# Altium PCB WaferPCB.PcbDoc (part 2 of 2)
Units mm, origin at the board's own origin, x right, y up, seen from the top; angles counter-clockwise.
Board outline 440 x 440 mm, 2 copper layers (Top Layer, Bottom Layer); 4 components, 400 nets, 800 pads, 0 vias.
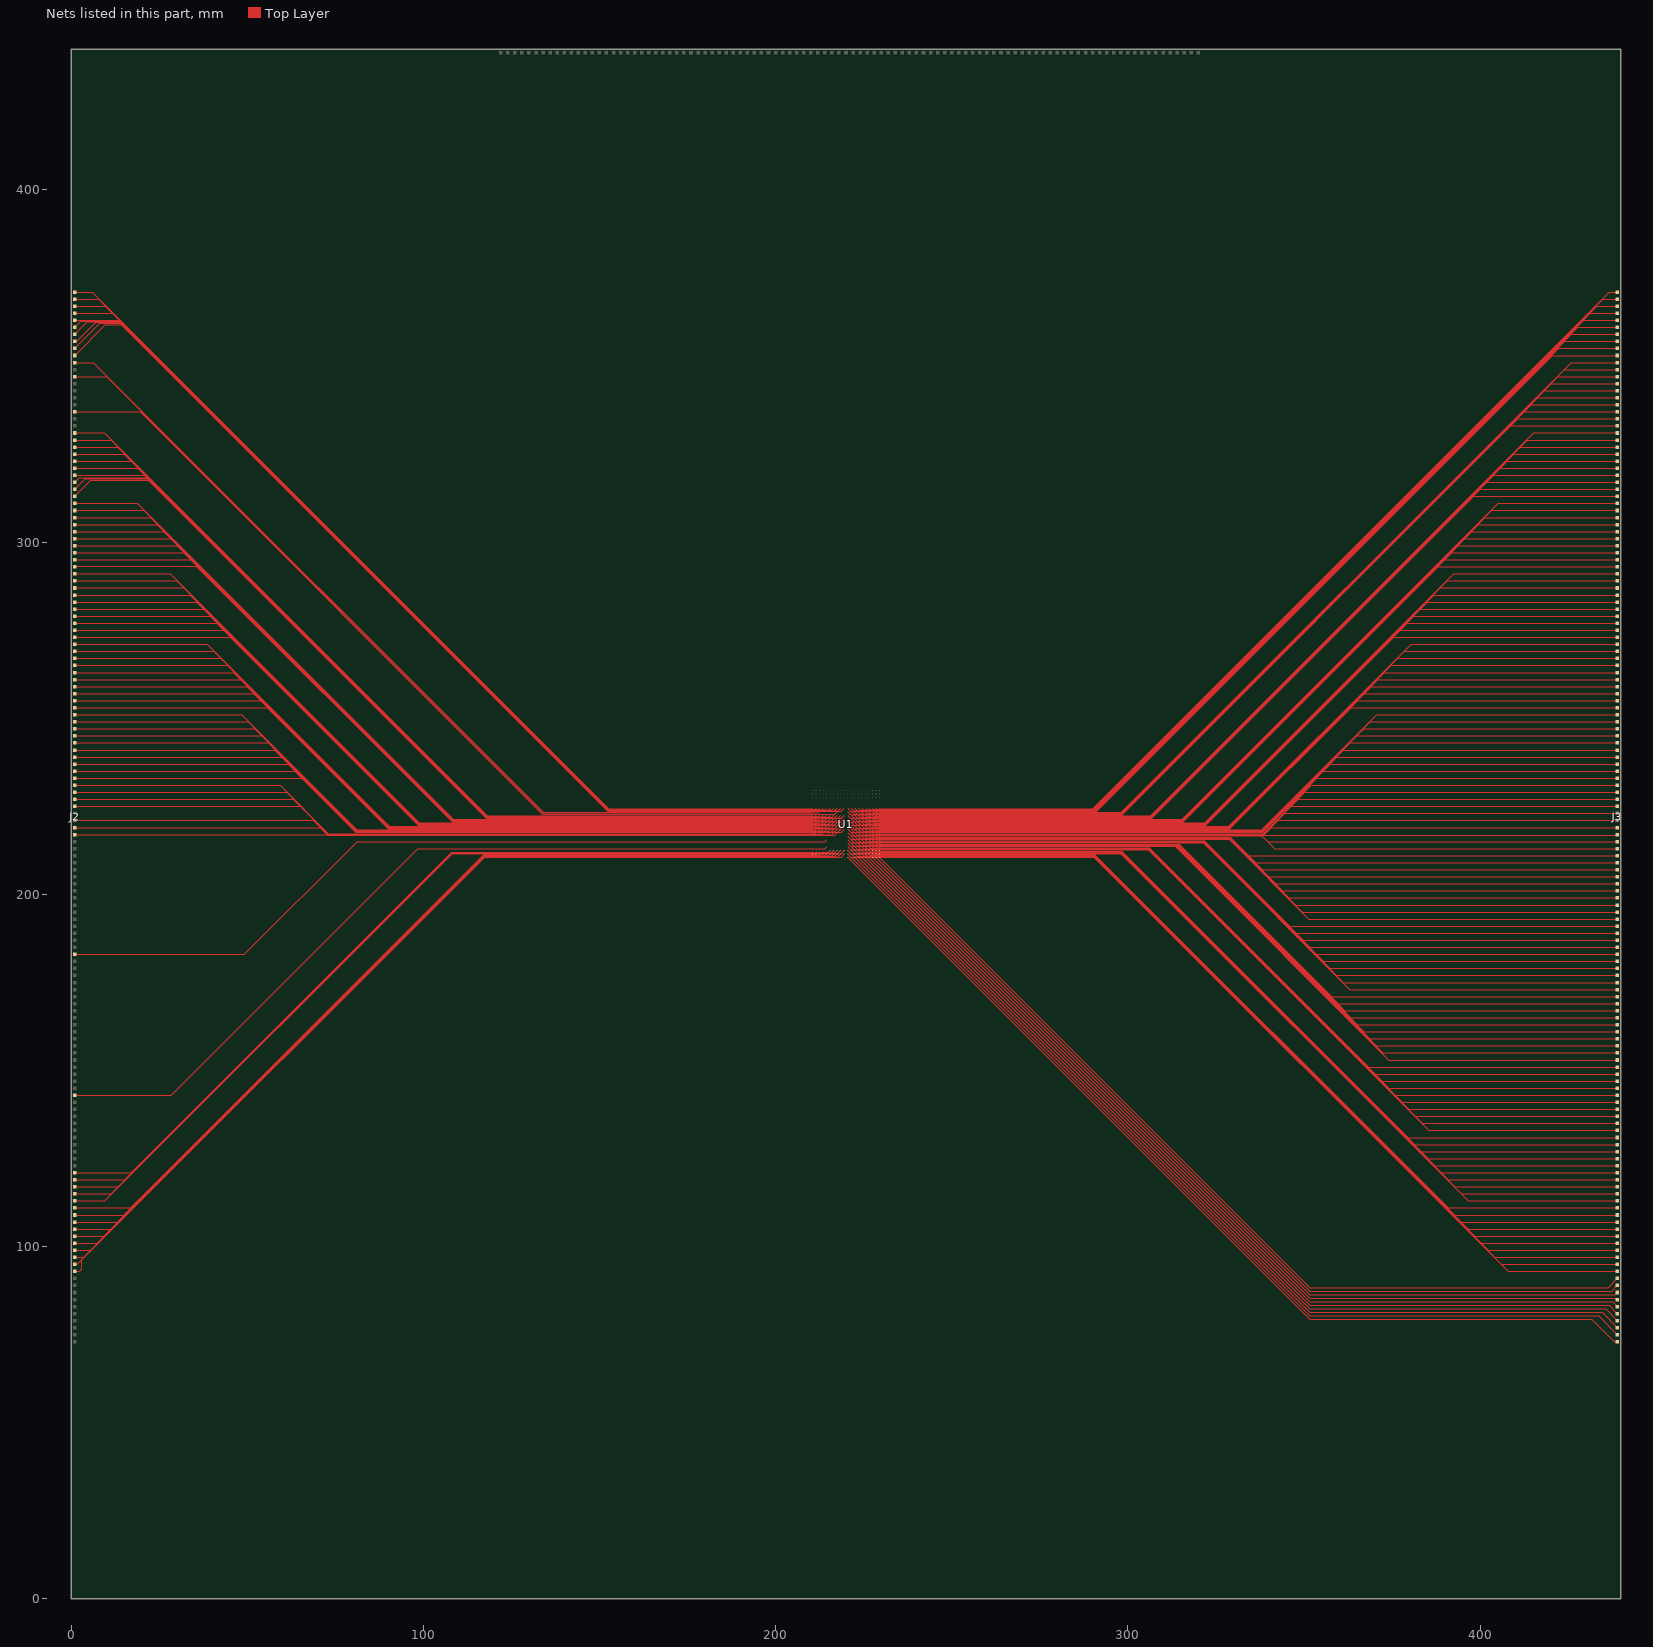
[diagram p2: the nets of this part, all layers, seen from the top]

## Nets (pads, with @x,y where several pads share a name; then routed paths per layer and width w, separated by ;. In a path a pad name is that pad's centre, name@x,y a point inside that pad or via, vN(x,y) a via of type N, cw(c..) or ccw(c..) an arc to the next point about the centre after c; other vN are vias at no path point) (continued)
NetJ2_64: J2.23 U1.348 | length 256.1
  Top Layer w0.03: J2.23@1,117 13.363,117 108.138,211.775 216.775,211.775 U1.348@217.5,212.5
NetJ2_65: J2.24 U1.347 | length 254.2
  Top Layer w0.03: J2.24@1,119 15.257,119 108.107,211.85 215.85,211.85 U1.347@216.5,212.5
NetJ2_66: J2.82 U1.229 | length 225
  Top Layer w0.03: J2.82@1,235 63.551,235 80.851,217.7 217.7,217.7 U1.229@218.5,218.5
NetJ2_67: J2.19 U1.362 | length 253
  Top Layer w0.03: J2.19@1,109 15.001,109 117.226,211.225 211.225,211.225 U1.362@211.5,211.5
NetJ2_68: J2.22 U1.349 | length 257.9
  Top Layer w0.03: J2.22@1,115 11.469,115 108.169,211.7 217.7,211.7 U1.349@218.5,212.5
NetJ2_69: J2.21 U1.350 | length 259.7
  Top Layer w0.03: J2.21@1,113 9.575,113 108.2,211.625 218.625,211.625 U1.350@219.5,212.5
NetJ2_70: J2.20 U1.361 | length 251.1
  Top Layer w0.03: J2.20@1,111 16.895,111 117.195,211.3 210.3,211.3 U1.361@210.5,211.5
NetJ2_71: J2.15 U1.366 | length 260.3
  Top Layer w0.03: J2.15@1,101 7.426,101 117.351,210.925 214.925,210.925 U1.366@215.5,211.5
NetJ2_72: J2.18 U1.363 | length 254.8
  Top Layer w0.03: J2.18@1,107 13.107,107 117.258,211.15 212.15,211.15 U1.363@212.5,211.5
NetJ2_73: J2.116 U1.165 | length 247.7
  Top Layer w0.03: J2.116@1,303 26.351,303 108.351,221 214,221 U1.165@214.5,221.5
NetJ2_74: J2.17 U1.364 | length 256.6
  Top Layer w0.03: J2.17@1,105 11.214,105 117.289,211.075 213.075,211.075 U1.364@213.5,211.5
NetJ2_75: J2.13 U1.368 | length 263.9
  Top Layer w0.03: J2.13@1,97 3.638,97 117.413,210.775 216.775,210.775 U1.368@217.5,211.5
NetJ2_76: J2.14 U1.367 | length 262.1
  Top Layer w0.03: J2.14@1,99 5.532,99 117.382,210.85 215.85,210.85 U1.367@216.5,211.5
NetJ2_77: J2.16 U1.365 | length 258.4
  Top Layer w0.03: J2.16@1,103 9.32,103 117.32,211 214,211 U1.365@214.5,211.5
NetJ2_78: J2.12 U1.369 | length 265.8
  Top Layer w0.03: J2.12@1,95 1.744,95 117.444,210.7 217.7,210.7 U1.369@218.5,211.5
NetJ2_79: J2.11 U1.370 | length 269.1
  Top Layer w0.03: J2.11@1,93 2.5,93 3.1,93.6 3.1,96.25 117.475,210.625 218.625,210.625 U1.370@219.5,211.5
NetJ2_80: J2.36 U1.325 | length 242.7
  Top Layer w0.03: J2.36@1,143 28.47,143 98.47,213 214,213 U1.325@214.5,213.5
NetJ2_81: J2.117 U1.164 | length 247.4
  Top Layer w0.03: J2.117@1,305 24.457,305 108.382,221.075 213.075,221.075 U1.164@213.5,221.5
NetJ2_82: J2.25 U1.346 | length 252.4
  Top Layer w0.03: J2.25@1,121 17.151,121 108.076,211.925 214.925,211.925 U1.346@215.5,212.5
NetJ2_83: J2.56 U1.285 | length 227
  Top Layer w0.03: J2.56@1,183 49.22,183 81.22,215 214,215 U1.285@214.5,215.5
NetJ2_84: J2.119 U1.162 | length 247
  Top Layer w0.03: J2.119@1,309 20.669,309 108.444,221.225 211.225,221.225 U1.162@211.5,221.5
NetJ2_85: J2.96 U1.205 | length 231.9
  Top Layer w0.03: J2.96@1,263 46.226,263 90.226,219 214,219 U1.205@214.5,219.5
NetJ2_86: J2.133 U1.128 | length 264.1
  Top Layer w0.03: J2.133@1,337 19.583,337 133.808,222.775 216.775,222.775 U1.128@217.5,223.5
NetJ2_87: J2.100 U1.201 | length 231
  Top Layer w0.03: J2.100@1,271 38.65,271 90.35,219.3 210.3,219.3 U1.201@210.5,219.5
NetJ2_88: J2.99 U1.202 | length 231.2
  Top Layer w0.03: J2.99@1,269 40.544,269 90.319,219.225 211.225,219.225 U1.202@211.5,219.5
NetJ2_89: J2.98 U1.203 | length 231.5
  Top Layer w0.03: J2.98@1,267 42.438,267 90.288,219.15 212.15,219.15 U1.203@212.5,219.5
NetJ2_90: J2.97 U1.204 | length 231.7
  Top Layer w0.03: J2.97@1,265 44.332,265 90.257,219.075 213.075,219.075 U1.204@213.5,219.5
NetJ2_91: J2.95 U1.206 | length 232.2
  Top Layer w0.03: J2.95@1,261 48.12,261 90.195,218.925 214.925,218.925 U1.206@215.5,219.5
NetJ2_92: J2.94 U1.207 | length 232.4
  Top Layer w0.03: J2.94@1,259 50.014,259 90.164,218.85 215.85,218.85 U1.207@216.5,219.5
NetJ2_93: J2.93 U1.208 | length 232.6
  Top Layer w0.03: J2.93@1,257 51.908,257 90.132,218.775 216.775,218.775 U1.208@217.5,219.5
NetJ2_94: J2.92 U1.209 | length 232.9
  Top Layer w0.03: J2.92@1,255 53.801,255 90.101,218.7 217.7,218.7 U1.209@218.5,219.5
NetJ2_95: J2.91 U1.210 | length 233.1
  Top Layer w0.03: J2.91@1,253 55.695,253 90.07,218.625 218.625,218.625 U1.210@219.5,219.5
NetJ2_96: J2.90 U1.221 | length 223.1
  Top Layer w0.03: J2.90@1,251 48.4,251 81.1,218.3 210.3,218.3 U1.221@210.5,218.5
NetJ2_97: J2.89 U1.222 | length 223.4
  Top Layer w0.03: J2.89@1,249 50.294,249 81.069,218.225 211.225,218.225 U1.222@211.5,218.5
NetJ2_98: J2.87 U1.224 | length 223.8
  Top Layer w0.03: J2.87@1,245 54.082,245 81.007,218.075 213.075,218.075 U1.224@213.5,218.5
NetJ2_99: J2.109 U1.182 | length 239.1
  Top Layer w0.03: J2.109@1,289 30.044,289 98.819,220.225 211.225,220.225 U1.182@211.5,220.5
NetJ2_100: J2.88 U1.223 | length 223.6
  Top Layer w0.03: J2.88@1,247 52.188,247 81.038,218.15 212.15,218.15 U1.223@212.5,218.5
NetJ2_101: J2.86 U1.225 | length 224.1
  Top Layer w0.03: J2.86@1,243 55.976,243 80.976,218 214,218 U1.225@214.5,218.5
NetJ2_102: J2.85 U1.226 | length 224.3
  Top Layer w0.03: J2.85@1,241 57.87,241 80.945,217.925 214.925,217.925 U1.226@215.5,218.5
NetJ2_103: J2.84 U1.227 | length 224.5
  Top Layer w0.03: J2.84@1,239 59.764,239 80.914,217.85 215.85,217.85 U1.227@216.5,218.5
NetJ2_104: J2.78 U1.243 | length 215.7
  Top Layer w0.03: J2.78@1,227 63.113,227 72.963,217.15 212.15,217.15 U1.243@212.5,217.5
NetJ2_105: J2.83 U1.228 | length 224.8
  Top Layer w0.03: J2.83@1,237 61.658,237 80.882,217.775 216.775,217.775 U1.228@217.5,218.5
NetJ2_106: J2.81 U1.230 | length 225.2
  Top Layer w0.03: J2.81@1,233 57.325,233 65.445,233 80.82,217.625 218.625,217.625 U1.230@219.5,218.5
NetJ2_107: J2.79 U1.242 | length 215.5
  Top Layer w0.03: J2.79@1,229 61.219,229 72.994,217.225 211.225,217.225 U1.242@211.5,217.5
NetJ2_108: J2.80 U1.241 | length 215.3
  Top Layer w0.03: J2.80@1,231 59.219,231 59.325,231 73.025,217.3 210.3,217.3 U1.241@210.5,217.5
NetJ2_109: J2.75 U1.246 | length 216.4
  Top Layer w0.03: J2.75@1,221 68.795,221 72.87,216.925 214.925,216.925 U1.246@215.5,217.5
NetJ2_110: J2.77 U1.244 | length 216
  Top Layer w0.03: J2.77@1,225 65.007,225 72.932,217.075 213.075,217.075 U1.244@213.5,217.5
NetJ2_111: J2.74 U1.247 | length 216.7
  Top Layer w0.03: J2.74@1,219 70.689,219 72.839,216.85 215.85,216.85 U1.247@216.5,217.5
NetJ2_112: J2.73 U1.248 | length 216.9
  Top Layer w0.03: J2.73@1,217 1.004,217.004 72.579,217.004 72.807,216.775 216.775,216.775 U1.248@217.5,217.5
NetJ2_113: J2.101 U1.190 | length 241
  Top Layer w0.03: J2.101@1,273 45.195,273 98.57,219.625 218.625,219.625 U1.190@219.5,220.5
NetJ2_114: J2.102 U1.189 | length 240.7
  Top Layer w0.03: J2.102@1,275 43.301,275 98.601,219.7 217.7,219.7 U1.189@218.5,220.5
NetJ2_115: J2.103 U1.188 | length 240.5
  Top Layer w0.03: J2.103@1,277 41.408,277 98.632,219.775 216.775,219.775 U1.188@217.5,220.5
NetJ2_116: J2.105 U1.186 | length 240
  Top Layer w0.03: J2.105@1,281 37.62,281 98.695,219.925 214.925,219.925 U1.186@215.5,220.5
NetJ2_117: J2.104 U1.187 | length 240.3
  Top Layer w0.03: J2.104@1,279 39.514,279 98.664,219.85 215.85,219.85 U1.187@216.5,220.5
NetJ2_118: J2.129 U1.142 | length 254.8
  Top Layer w0.03: J2.129@1,329 11.369,329 118.144,222.225 211.225,222.225 U1.142@211.5,222.5
NetJ2_119: J2.106 U1.185 | length 239.8
  Top Layer w0.03: J2.106@1,283 35.726,283 98.726,220 214,220 U1.185@214.5,220.5
NetJ2_120: J2.107 U1.184 | length 239.6
  Top Layer w0.03: J2.107@1,285 33.832,285 98.757,220.075 213.075,220.075 U1.184@213.5,220.5
NetJ2_121: J2.110 U1.181 | length 238.9
  Top Layer w0.03: J2.110@1,291 28.15,291 98.85,220.3 210.3,220.3 U1.181@210.5,220.5
NetJ2_122: J2.108 U1.183 | length 239.3
  Top Layer w0.03: J2.108@1,287 31.938,287 98.788,220.15 212.15,220.15 U1.183@212.5,220.5
NetJ2_123: J2.112 U1.169 | length 248.6
  Top Layer w0.03: J2.112@1,295 33.927,295 108.226,220.7 217.7,220.7 U1.169@218.5,221.5
NetJ2_124: J2.111 U1.170 | length 249
  Top Layer w0.03: J2.111@1,293 1.223,293.223 35.598,293.223 108.195,220.625 218.625,220.625 U1.170@219.5,221.5
NetJ2_125: J2.113 U1.168 | length 248.4
  Top Layer w0.03: J2.113@1,297 32.033,297 108.257,220.775 216.775,220.775 U1.168@217.5,221.5
NetJ2_126: J2.115 U1.166 | length 247.9
  Top Layer w0.03: J2.115@1,301 28.245,301 108.32,220.925 214.925,220.925 U1.166@215.5,221.5
NetJ2_127: J2.118 U1.163 | length 247.2
  Top Layer w0.03: J2.118@1,307 22.563,307 108.413,221.15 212.15,221.15 U1.163@212.5,221.5
NetJ2_128: J2.114 U1.167 | length 248.1
  Top Layer w0.03: J2.114@1,299 30.139,299 108.289,220.85 215.85,220.85 U1.167@216.5,221.5
NetJ2_129: J2.124 U1.147 | length 256
  Top Layer w0.03: J2.124@1,319 1.725,319 20.839,319 117.989,221.85 215.85,221.85 U1.147@216.5,222.5
NetJ2_130: J2.120 U1.161 | length 246.7
  Top Layer w0.03: J2.120@1,311 18.775,311 108.475,221.3 210.3,221.3 U1.161@210.5,221.5
NetJ2_131: J2.130 U1.141 | length 254.6
  Top Layer w0.03: J2.130@1,331 9.475,331 118.175,222.3 210.3,222.3 U1.141@210.5,222.5
NetJ2_132: J2.121 U1.150 | length 260.6
  Top Layer w0.03: J2.121@1,313 1.75,313.75 5.65,317.65 21.87,317.65 117.895,221.625 218.625,221.625 U1.150@219.5,222.5
NetJ2_133: J2.122 U1.149 | length 259
  Top Layer w0.03: J2.122@1,315 1.65,315.65 4,318 21.626,318 117.926,221.7 217.7,221.7 U1.149@218.5,222.5
NetJ2_134: J2.123 U1.148 | length 257.3
  Top Layer w0.03: J2.123@1,317 2.325,318.325 21.408,318.325 117.957,221.775 216.775,221.775 U1.148@217.5,222.5
NetJ2_135: J2.145 U1.106 | length 273
  Top Layer w0.03: J2.145@1,361 2.775,362.775 13.67,362.775 152.52,223.925 214.925,223.925 U1.106@215.5,224.5
NetJ2_136: J2.140 U1.121 | length 262.5
  Top Layer w0.03: J2.140@1,351 6.325,351 134.025,223.3 210.3,223.3 U1.121@210.5,223.5
NetJ2_137: J2.125 U1.146 | length 255.8
  Top Layer w0.03: J2.125@1,321 18.945,321 118.02,221.925 214.925,221.925 U1.146@215.5,222.5
NetJ2_138: J2.128 U1.143 | length 255.1
  Top Layer w0.03: J2.128@1,327 2.025,327 13.263,327 118.113,222.15 212.15,222.15 U1.143@212.5,222.5
NetJ2_139: J2.141 U1.110 | length 279.7
  Top Layer w0.03: J2.141@1,353 9.773,361.773 14.248,361.773 152.395,223.625 218.625,223.625 U1.110@219.5,224.5
NetJ2_140: J2.143 U1.108 | length 276.4
  Top Layer w0.03: J2.143@1,357 1.6,357 6.975,362.375 13.858,362.375 152.458,223.775 216.775,223.775 U1.108@217.5,224.5
NetJ2_141: J2.126 U1.145 | length 255.5
  Top Layer w0.03: J2.126@1,323 2.275,323 17.051,323 118.051,222 214,222 U1.145@214.5,222.5
NetJ2_142: J2.127 U1.144 | length 255.3
  Top Layer w0.03: J2.127@1,325 2.35,325 15.157,325 118.082,222.075 213.075,222.075 U1.144@213.5,222.5
NetJ2_143: J2.142 U1.109 | length 278.2
  Top Layer w0.03: J2.142@1,355 8.175,362.175 13.951,362.175 152.426,223.7 217.7,223.7 U1.109@218.5,224.5
NetJ2_144: J2.149 U1.102 | length 270.6
  Top Layer w0.03: J2.149@1,369 7.869,369 152.644,224.225 211.225,224.225 U1.102@211.5,224.5
NetJ2_145: J2.144 U1.107 | length 274.7
  Top Layer w0.03: J2.144@1,359 4.6,362.6 13.739,362.6 152.489,223.85 215.85,223.85 U1.107@216.5,224.5
NetJ2_146: J2.148 U1.103 | length 270.8
  Top Layer w0.03: J2.148@1,367 9.763,367 152.613,224.15 212.15,224.15 U1.103@212.5,224.5
NetJ2_147: J2.147 U1.104 | length 271
  Top Layer w0.03: J2.147@1,365 11.657,365 152.582,224.075 213.075,224.075 U1.104@213.5,224.5
NetJ2_148: J2.138 U1.123 | length 262.9
  Top Layer w0.03: J2.138@1,347 10.113,347 133.963,223.15 212.15,223.15 U1.123@212.5,223.5
NetJ2_149: J2.146 U1.105 | length 271.3
  Top Layer w0.03: J2.146@1,363 13.551,363 152.551,224 214,224 U1.105@214.5,224.5
NetJ2_150: J2.150 U1.101 | length 270.3
  Top Layer w0.03: J2.150@1,371 5.975,371 152.675,224.3 210.3,224.3 U1.101@210.5,224.5
NetJ3_1: J3.78 U1.258 | length 215.7
  Top Layer w0.03: U1.258@227.5,217.5 227.85,217.15 338.476,217.15 348.326,227 J3.78@439,227
NetJ3_2: J3.4 U1.394 | length 270
  Top Layer w0.03: U1.394@223.5,210.5 351.625,82.375 435.625,82.375 J3.4@439,79
NetJ3_3: J3.1 U1.391 | length 275.5
  Top Layer w0.03: U1.391@220.5,210.5 351.625,79.375 431.75,79.375 438.125,73 J3.1@439,73
NetJ3_4: J3.2 U1.392 | length 273.6
  Top Layer w0.03: U1.392@221.5,210.5 351.625,80.375 433.625,80.375 J3.2@439,75
NetJ3_5: J3.5 U1.395 | length 268.1
  Top Layer w0.03: U1.395@224.5,210.5 351.625,83.375 436.625,83.375 J3.5@439,81
NetJ3_6: J3.3 U1.393 | length 271.8
  Top Layer w0.03: U1.393@222.5,210.5 351.625,81.375 434.625,81.375 J3.3@439,77
NetJ3_7: J3.7 U1.397 | length 264.5
  Top Layer w0.03: U1.397@226.5,210.5 351.625,85.375 438.625,85.375 J3.7@439,85
NetJ3_8: J3.9 U1.399 | length 262.2
  Top Layer w0.03: U1.399@228.5,210.5 351.625,87.375 437.375,87.375 J3.9@439,89
NetJ3_9: J3.10 U1.400 | length 261.2
  Top Layer w0.03: U1.400@229.5,210.5 351.625,88.375 436.375,88.375 J3.10@439,91
NetJ3_10: J3.8 U1.398 | length 263.2
  Top Layer w0.03: U1.398@227.5,210.5 351.625,86.375 438.375,86.375 J3.8@439,87
NetJ3_11: J3.6 U1.396 | length 266.3
  Top Layer w0.03: U1.396@225.5,210.5 351.625,84.375 437.625,84.375 J3.6@439,83
NetJ3_12: J3.71 U1.251 | length 220.4
  Top Layer w0.03: U1.251@220.5,217.5 221.375,216.625 338.05,216.625 341.675,213 J3.71@439,213
NetJ3_13: J3.70 U1.280 | length 211.8
  Top Layer w0.03: U1.280@229.5,216.5 229.7,216.3 329.08,216.3 334.38,211 J3.70@439,211
NetJ3_14: J3.68 U1.278 | length 215.4
  Top Layer w0.03: U1.278@227.5,216.5 227.85,216.15 329.017,216.15 338.167,207 J3.68@439,207
NetJ3_15: J3.67 U1.277 | length 217.3
  Top Layer w0.03: U1.277@226.5,216.5 226.925,216.075 328.986,216.075 340.061,205 J3.67@439,205
NetJ3_16: J3.26 U1.356 | length 250.6
  Top Layer w0.03: U1.356@225.5,212.5 226,212 298.155,212 387.155,123 J3.26@439,123
NetJ3_17: J3.61 U1.271 | length 228.2
  Top Layer w0.03: U1.271@220.5,216.5 221.375,215.625 328.8,215.625 351.425,193 J3.61@439,193
NetJ3_18: J3.69 U1.279 | length 213.6
  Top Layer w0.03: U1.279@228.5,216.5 228.775,216.225 329.049,216.225 336.273,209 J3.69@439,209
NetJ3_19: J3.66 U1.276 | length 219.1
  Top Layer w0.03: U1.276@225.5,216.5 226,216 328.955,216 341.955,203 J3.66@439,203
NetJ3_20: J3.63 U1.273 | length 224.6
  Top Layer w0.03: U1.273@222.5,216.5 223.225,215.775 328.862,215.775 347.637,197 J3.63@439,197
NetJ3_21: J3.64 U1.274 | length 222.7
  Top Layer w0.03: U1.274@223.5,216.5 224.15,215.85 328.893,215.85 345.743,199 J3.64@439,199
NetJ3_22: J3.65 U1.275 | length 220.9
  Top Layer w0.03: U1.275@224.5,216.5 225.075,215.925 328.924,215.925 343.849,201 J3.65@439,201
NetJ3_23: J3.59 U1.299 | length 221.5
  Top Layer w0.03: U1.299@228.5,215.5 228.775,215.225 321.624,215.225 347.849,189 J3.59@439,189
NetJ3_24: J3.60 U1.300 | length 219.6
  Top Layer w0.03: U1.300@229.5,215.5 229.7,215.3 321.655,215.3 345.955,191 J3.60@439,191
NetJ3_25: J3.57 U1.297 | length 225.1
  Top Layer w0.03: U1.297@226.5,215.5 226.925,215.075 321.561,215.075 351.636,185 J3.57@439,185
NetJ3_26: J3.55 U1.295 | length 228.8
  Top Layer w0.03: U1.295@224.5,215.5 225.075,214.925 321.499,214.925 355.424,181 J3.55@439,181
NetJ3_27: J3.58 U1.298 | length 223.3
  Top Layer w0.03: U1.298@227.5,215.5 227.85,215.15 321.592,215.15 349.742,187 J3.58@439,187
NetJ3_28: J3.53 U1.293 | length 232.4
  Top Layer w0.03: U1.293@222.5,215.5 223.225,214.775 321.437,214.775 359.212,177 J3.53@439,177
NetJ3_29: J3.50 U1.320 | length 227.5
  Top Layer w0.03: U1.320@229.5,214.5 229.7,214.3 314.625,214.3 357.925,171 J3.50@439,171
NetJ3_30: J3.51 U1.291 | length 236.1
  Top Layer w0.03: U1.291@220.5,215.5 221.375,214.625 321.375,214.625 363,173 J3.51@439,173
NetJ3_31: J3.52 U1.292 | length 234.3
  Top Layer w0.03: U1.292@221.5,215.5 222.3,214.7 321.406,214.7 361.106,175 J3.52@439,175
NetJ3_32: J3.54 U1.294 | length 230.6
  Top Layer w0.03: U1.294@223.5,215.5 224.15,214.85 321.468,214.85 357.318,179 J3.54@439,179
NetJ3_33: J3.49 U1.319 | length 229.3
  Top Layer w0.03: U1.319@228.5,214.5 228.775,214.225 314.5,214.225 359.725,169 J3.49@439,169
NetJ3_34: J3.47 U1.317 | length 233
  Top Layer w0.03: U1.317@226.5,214.5 226.925,214.075 314.25,214.075 363.325,165 J3.47@439,165
NetJ3_35: J3.43 U1.313 | length 240.3
  Top Layer w0.03: U1.313@222.5,214.5 223.225,213.775 313.75,213.775 370.525,157 J3.43@439,157
NetJ3_36: J3.72 U1.252 | length 218.5
  Top Layer w0.03: U1.252@221.5,217.5 222.3,216.7 338.081,216.7 339.781,215 J3.72@439,215
NetJ3_37: J3.48 U1.318 | length 231.2
  Top Layer w0.03: U1.318@227.5,214.5 227.85,214.15 314.375,214.15 361.525,167 J3.48@439,167
NetJ3_38: J3.42 U1.312 | length 242.1
  Top Layer w0.03: U1.312@221.5,214.5 222.3,213.7 313.625,213.7 372.325,155 J3.42@439,155
NetJ3_39: J3.39 U1.339 | length 237.2
  Top Layer w0.03: U1.339@228.5,213.5 228.775,213.225 306.074,213.225 370.298,149 J3.39@439,149
NetJ3_40: J3.46 U1.316 | length 234.8
  Top Layer w0.03: U1.316@225.5,214.5 226,214 314.125,214 365.125,163 J3.46@439,163
NetJ3_41: J3.37 U1.337 | length 240.9
  Top Layer w0.03: U1.337@226.5,213.5 226.925,213.075 306.011,213.075 374.086,145 J3.37@439,145
NetJ3_42: J3.44 U1.314 | length 238.5
  Top Layer w0.03: U1.314@223.5,214.5 224.15,213.85 313.875,213.85 368.725,159 J3.44@439,159
NetJ3_43: J3.41 U1.311 | length 244
  Top Layer w0.03: U1.311@220.5,214.5 221.375,213.625 313.5,213.625 374.125,153 J3.41@439,153
NetJ3_44: J3.35 U1.335 | length 244.5
  Top Layer w0.03: U1.335@224.5,213.5 225.075,212.925 305.949,212.925 377.874,141 J3.35@439,141
NetJ3_45: J3.40 U1.340 | length 235.4
  Top Layer w0.03: U1.340@229.5,213.5 229.7,213.3 306.105,213.3 368.405,151 J3.40@439,151
NetJ3_46: J3.33 U1.333 | length 248.2
  Top Layer w0.03: U1.333@222.5,213.5 223.225,212.775 305.887,212.775 381.662,137 J3.33@439,137
NetJ3_47: J3.32 U1.332 | length 250
  Top Layer w0.03: U1.332@221.5,213.5 222.3,212.7 305.856,212.7 383.556,135 J3.32@439,135
NetJ3_48: J3.38 U1.338 | length 239
  Top Layer w0.03: U1.338@227.5,213.5 227.85,213.15 306.043,213.15 372.192,147 J3.38@439,147
NetJ3_49: J3.31 U1.331 | length 251.8
  Top Layer w0.03: U1.331@220.5,213.5 221.375,212.625 305.825,212.625 385.45,133 J3.31@439,133
NetJ3_50: J3.34 U1.334 | length 246.4
  Top Layer w0.03: U1.334@223.5,213.5 224.15,212.85 305.918,212.85 379.768,139 J3.34@439,139
NetJ3_51: J3.62 U1.272 | length 226.4
  Top Layer w0.03: U1.272@221.5,216.5 222.3,215.7 328.831,215.7 349.531,195 J3.62@439,195
NetJ3_52: J3.29 U1.359 | length 245.1
  Top Layer w0.03: U1.359@228.5,212.5 228.775,212.225 298.249,212.225 381.473,129 J3.29@439,129
NetJ3_53: J3.30 U1.360 | length 243.3
  Top Layer w0.03: U1.360@229.5,212.5 229.7,212.3 298.28,212.3 379.58,131 J3.30@439,131
NetJ3_54: J3.27 U1.357 | length 248.7
  Top Layer w0.03: U1.357@226.5,212.5 226.925,212.075 298.186,212.075 385.261,125 J3.27@439,125
NetJ3_55: J3.28 U1.358 | length 246.9
  Top Layer w0.03: U1.358@227.5,212.5 227.85,212.15 298.217,212.15 383.367,127 J3.28@439,127
NetJ3_56: J3.24 U1.354 | length 254.2
  Top Layer w0.03: U1.354@223.5,212.5 224.15,211.85 298.093,211.85 390.943,119 J3.24@439,119
NetJ3_57: J3.25 U1.355 | length 252.4
  Top Layer w0.03: U1.355@224.5,212.5 225.075,211.925 298.124,211.925 389.049,121 J3.25@439,121
NetJ3_58: J3.22 U1.352 | length 257.9
  Top Layer w0.03: U1.352@221.5,212.5 222.3,211.7 298.031,211.7 394.731,115 J3.22@439,115
NetJ3_59: J3.23 U1.353 | length 256.1
  Top Layer w0.03: U1.353@222.5,212.5 223.225,211.775 298.062,211.775 392.837,117 J3.23@439,117
NetJ3_60: J3.20 U1.380 | length 251.1
  Top Layer w0.03: U1.380@229.5,211.5 229.7,211.3 290.63,211.3 390.93,111 J3.20@439,111
NetJ3_61: J3.21 U1.351 | length 259.7
  Top Layer w0.03: U1.351@220.5,212.5 221.375,211.625 298,211.625 396.625,113 J3.21@439,113
NetJ3_62: J3.18 U1.378 | length 254.8
  Top Layer w0.03: U1.378@227.5,211.5 227.85,211.15 290.567,211.15 394.717,107 J3.18@439,107
NetJ3_63: J3.19 U1.379 | length 253
  Top Layer w0.03: U1.379@228.5,211.5 228.775,211.225 290.599,211.225 392.823,109 J3.19@439,109
NetJ3_64: J3.17 U1.377 | length 256.6
  Top Layer w0.03: U1.377@226.5,211.5 226.925,211.075 290.536,211.075 396.611,105 J3.17@439,105
NetJ3_65: J3.13 U1.373 | length 263.9
  Top Layer w0.03: U1.373@222.5,211.5 223.225,210.775 290.412,210.775 404.187,97 J3.13@439,97
NetJ3_66: J3.15 U1.375 | length 260.3
  Top Layer w0.03: U1.375@224.5,211.5 225.075,210.925 290.474,210.925 400.399,101 J3.15@439,101
NetJ3_67: J3.11 U1.371 | length 267.6
  Top Layer w0.03: U1.371@220.5,211.5 221.375,210.625 290.35,210.625 407.975,93 J3.11@439,93
NetJ3_68: J3.45 U1.315 | length 236.7
  Top Layer w0.03: U1.315@224.5,214.5 225.075,213.925 314,213.925 366.925,161 J3.45@439,161
NetJ3_69: J3.16 U1.376 | length 258.4
  Top Layer w0.03: U1.376@225.5,211.5 226,211 290.505,211 398.505,103 J3.16@439,103
NetJ3_70: J3.14 U1.374 | length 262.1
  Top Layer w0.03: U1.374@223.5,211.5 224.15,210.85 290.443,210.85 402.293,99 J3.14@439,99
NetJ3_71: J3.56 U1.296 | length 227
  Top Layer w0.03: U1.296@225.5,215.5 226,215 321.53,215 353.53,183 J3.56@439,183
NetJ3_72: J3.12 U1.372 | length 265.8
  Top Layer w0.03: U1.372@221.5,211.5 222.3,210.7 290.381,210.7 406.081,95 J3.12@439,95
NetJ3_73: J3.132 U1.132 | length 264.3
  Top Layer w0.03: U1.132@221.5,223.5 222.3,222.7 298.374,222.7 410.674,335 J3.132@439,335
NetJ3_74: J3.36 U1.336 | length 242.7
  Top Layer w0.03: U1.336@225.5,213.5 226,213 305.98,213 375.98,143 J3.36@439,143
NetJ3_75: J3.111 U1.171 | length 248.8
  Top Layer w0.03: U1.171@220.5,221.5 221.375,220.625 315.755,220.625 388.13,293 J3.111@439,293
NetJ3_76: J3.133 U1.133 | length 264.1
  Top Layer w0.03: U1.133@222.5,223.5 223.225,222.775 298.343,222.775 412.568,337 J3.133@439,337
NetJ3_77: J3.143 U1.113 | length 272
  Top Layer w0.03: U1.113@222.5,224.5 223.225,223.775 290.875,223.775 424.1,357 J3.143@439,357
NetJ3_78: J3.131 U1.131 | length 264.6
  Top Layer w0.03: U1.131@220.5,223.5 221.375,222.625 298.405,222.625 408.78,333 J3.131@439,333
NetJ3_79: J3.134 U1.134 | length 263.9
  Top Layer w0.03: U1.134@223.5,223.5 224.15,222.85 298.311,222.85 414.461,339 J3.134@439,339
NetJ3_80: J3.125 U1.155 | length 255.8
  Top Layer w0.03: U1.155@224.5,222.5 225.075,221.925 306.68,221.925 405.755,321 J3.125@439,321
NetJ3_81: J3.129 U1.159 | length 254.8
  Top Layer w0.03: U1.159@228.5,222.5 228.775,222.225 306.556,222.225 413.331,329 J3.129@439,329
NetJ3_82: J3.121 U1.151 | length 256.7
  Top Layer w0.03: U1.151@220.5,222.5 221.375,221.625 306.805,221.625 398.18,313 J3.121@439,313
NetJ3_83: J3.130 U1.160 | length 254.6
  Top Layer w0.03: U1.160@229.5,222.5 229.7,222.3 306.525,222.3 415.225,331 J3.130@439,331
NetJ3_84: J3.120 U1.180 | length 246.7
  Top Layer w0.03: U1.180@229.5,221.5 229.7,221.3 315.475,221.3 405.175,311 J3.120@439,311
NetJ3_85: J3.118 U1.178 | length 247.2
  Top Layer w0.03: U1.178@227.5,221.5 227.85,221.15 315.537,221.15 401.387,307 J3.118@439,307
NetJ3_86: J3.119 U1.179 | length 247
  Top Layer w0.03: U1.179@228.5,221.5 228.775,221.225 315.506,221.225 403.281,309 J3.119@439,309
NetJ3_87: J3.117 U1.177 | length 247.4
  Top Layer w0.03: U1.177@226.5,221.5 226.925,221.075 315.568,221.075 399.493,305 J3.117@439,305
NetJ3_88: J3.128 U1.158 | length 255.1
  Top Layer w0.03: U1.158@227.5,222.5 227.85,222.15 306.587,222.15 411.437,327 J3.128@439,327
NetJ3_89: J3.115 U1.175 | length 247.9
  Top Layer w0.03: U1.175@224.5,221.5 225.075,220.925 315.63,220.925 395.705,301 J3.115@439,301
NetJ3_90: J3.113 U1.173 | length 248.4
  Top Layer w0.03: U1.173@222.5,221.5 223.225,220.775 315.693,220.775 391.918,297 J3.113@439,297
NetJ3_91: J3.127 U1.157 | length 255.3
  Top Layer w0.03: U1.157@226.5,222.5 226.925,222.075 306.618,222.075 409.543,325 J3.127@439,325
NetJ3_92: J3.123 U1.153 | length 256.2
  Top Layer w0.03: U1.153@222.5,222.5 223.225,221.775 306.743,221.775 401.968,317 J3.123@439,317
NetJ3_93: J3.114 U1.174 | length 248.1
  Top Layer w0.03: U1.174@223.5,221.5 224.15,220.85 315.661,220.85 393.811,299 J3.114@439,299
NetJ3_94: J3.112 U1.172 | length 248.6
  Top Layer w0.03: U1.172@221.5,221.5 222.3,220.7 315.724,220.7 390.024,295 J3.112@439,295
NetJ3_95: J3.122 U1.152 | length 256.5
  Top Layer w0.03: U1.152@221.5,222.5 222.3,221.7 306.774,221.7 400.074,315 J3.122@439,315
NetJ3_96: J3.126 U1.156 | length 255.5
  Top Layer w0.03: U1.156@225.5,222.5 226,222 306.649,222 407.649,323 J3.126@439,323
NetJ3_97: J3.110 U1.200 | length 238.9
  Top Layer w0.03: U1.200@229.5,220.5 229.7,220.3 321.85,220.3 392.55,291 J3.110@439,291
NetJ3_98: J3.107 U1.197 | length 239.6
  Top Layer w0.03: U1.197@226.5,220.5 226.925,220.075 321.943,220.075 386.868,285 J3.107@439,285
NetJ3_99: J3.109 U1.199 | length 239.1
  Top Layer w0.03: U1.199@228.5,220.5 228.775,220.225 321.881,220.225 390.656,289 J3.109@439,289
NetJ3_100: J3.104 U1.194 | length 240.3
  Top Layer w0.03: U1.194@223.5,220.5 224.15,219.85 322.036,219.85 381.186,279 J3.104@439,279
NetJ3_101: J3.106 U1.196 | length 239.8
  Top Layer w0.03: U1.196@225.5,220.5 226,220 321.974,220 384.974,283 J3.106@439,283
NetJ3_102: J3.96 U1.216 | length 231.9
  Top Layer w0.03: U1.216@225.5,219.5 226,219 328.849,219 372.849,263 J3.96@439,263
NetJ3_103: J3.105 U1.195 | length 240
  Top Layer w0.03: U1.195@224.5,220.5 225.075,219.925 322.005,219.925 383.08,281 J3.105@439,281
NetJ3_104: J3.97 U1.217 | length 231.7
  Top Layer w0.03: U1.217@226.5,219.5 226.925,219.075 328.818,219.075 374.743,265 J3.97@439,265
NetJ3_105: J3.101 U1.191 | length 241
  Top Layer w0.03: U1.191@220.5,220.5 221.375,219.625 322.13,219.625 375.505,273 J3.101@439,273
NetJ3_106: J3.95 U1.215 | length 232.2
  Top Layer w0.03: U1.215@224.5,219.5 225.075,218.925 328.88,218.925 370.955,261 J3.95@439,261
NetJ3_107: J3.102 U1.192 | length 240.7
  Top Layer w0.03: U1.192@221.5,220.5 222.3,219.7 322.099,219.7 377.399,275 J3.102@439,275
NetJ3_108: J3.99 U1.219 | length 231.2
  Top Layer w0.03: U1.219@228.5,219.5 228.775,219.225 328.756,219.225 378.531,269 J3.99@439,269
NetJ3_109: J3.94 U1.214 | length 232.4
  Top Layer w0.03: U1.214@223.5,219.5 224.15,218.85 328.911,218.85 369.061,259 J3.94@439,259
NetJ3_110: J3.91 U1.211 | length 233.1
  Top Layer w0.03: U1.211@220.5,219.5 221.375,218.625 329.005,218.625 363.38,253 J3.91@439,253
NetJ3_111: J3.92 U1.212 | length 232.9
  Top Layer w0.03: U1.212@221.5,219.5 222.3,218.7 328.974,218.7 365.274,255 J3.92@439,255
NetJ3_112: J3.93 U1.213 | length 232.6
  Top Layer w0.03: U1.213@222.5,219.5 223.225,218.775 328.943,218.775 367.168,257 J3.93@439,257
NetJ3_113: J3.100 U1.220 | length 231
  Top Layer w0.03: U1.220@229.5,219.5 229.7,219.3 328.725,219.3 380.425,271 J3.100@439,271
NetJ3_114: J3.88 U1.238 | length 223.6
  Top Layer w0.03: U1.238@227.5,218.5 227.85,218.15 338.062,218.15 366.912,247 J3.88@439,247
NetJ3_115: J3.90 U1.240 | length 223.1
  Top Layer w0.03: U1.240@229.5,218.5 229.7,218.3 338,218.3 370.7,251 J3.90@439,251
NetJ3_116: J3.89 U1.239 | length 223.4
  Top Layer w0.03: U1.239@228.5,218.5 228.775,218.225 338.031,218.225 368.806,249 J3.89@439,249
NetJ3_117: J3.86 U1.236 | length 224.1
  Top Layer w0.03: U1.236@225.5,218.5 226,218 338.124,218 363.124,243 J3.86@439,243
NetJ3_118: J3.73 U1.253 | length 216.9
  Top Layer w0.03: U1.253@222.5,217.5 223.225,216.775 438.775,216.775 J3.73@439,217
NetJ3_119: J3.87 U1.237 | length 223.8
  Top Layer w0.03: U1.237@226.5,218.5 226.925,218.075 338.093,218.075 365.018,245 J3.87@439,245
NetJ3_120: J3.80 U1.260 | length 215.3
  Top Layer w0.03: U1.260@229.5,217.5 229.7,217.3 338.414,217.3 352.114,231 J3.80@439,231
NetJ3_121: J3.85 U1.235 | length 224.3
  Top Layer w0.03: U1.235@224.5,218.5 225.075,217.925 338.155,217.925 361.23,241 J3.85@439,241
NetJ3_122: J3.82 U1.232 | length 225
  Top Layer w0.03: U1.232@221.5,218.5 222.3,217.7 338.249,217.7 355.549,235 J3.82@439,235
NetJ3_123: J3.84 U1.234 | length 224.5
  Top Layer w0.03: U1.234@223.5,218.5 224.15,217.85 338.186,217.85 359.336,239 J3.84@439,239
NetJ3_124: J3.141 U1.111 | length 272.5
  Top Layer w0.03: U1.111@220.5,224.5 221.375,223.625 291.125,223.625 420.5,353 J3.141@439,353
NetJ3_125: J3.81 U1.231 | length 225.2
  Top Layer w0.03: U1.231@220.5,218.5 221.375,217.625 338.28,217.625 353.655,233 J3.81@439,233
NetJ3_126: J3.83 U1.233 | length 224.8
  Top Layer w0.03: U1.233@222.5,218.5 223.225,217.775 338.218,217.775 357.443,237 J3.83@439,237
NetJ3_127: J3.137 U1.137 | length 263.2
  Top Layer w0.03: U1.137@226.5,223.5 226.925,223.075 298.218,223.075 420.143,345 J3.137@439,345
NetJ3_128: J3.108 U1.198 | length 239.3
  Top Layer w0.03: U1.198@227.5,220.5 227.85,220.15 321.912,220.15 388.762,287 J3.108@439,287
NetJ3_129: J3.144 U1.114 | length 271.8
  Top Layer w0.03: U1.114@223.5,224.5 224.15,223.85 290.75,223.85 425.9,359 J3.144@439,359
NetJ3_130: J3.139 U1.139 | length 262.7
  Top Layer w0.03: U1.139@228.5,223.5 228.775,223.225 298.156,223.225 423.931,349 J3.139@439,349
NetJ3_131: J3.116 U1.176 | length 247.7
  Top Layer w0.03: U1.176@225.5,221.5 226,221 315.599,221 397.599,303 J3.116@439,303
NetJ3_132: J3.98 U1.218 | length 231.5
  Top Layer w0.03: U1.218@227.5,219.5 227.85,219.15 328.787,219.15 376.637,267 J3.98@439,267
NetJ3_133: J3.75 U1.255 | length 216.4
  Top Layer w0.03: U1.255@224.5,217.5 225.075,216.925 338.57,216.925 342.645,221 J3.75@439,221
NetJ3_134: J3.135 U1.135 | length 263.6
  Top Layer w0.03: U1.135@224.5,223.5 225.075,222.925 298.28,222.925 416.355,341 J3.135@439,341
NetJ3_135: J3.74 U1.254 | length 216.7
  Top Layer w0.03: U1.254@223.5,217.5 224.15,216.85 338.601,216.85 340.751,219 J3.74@439,219
NetJ3_136: J3.142 U1.112 | length 272.2
  Top Layer w0.03: U1.112@221.5,224.5 222.3,223.7 291,223.7 422.3,355 J3.142@439,355
NetJ3_137: J3.138 U1.138 | length 262.9
  Top Layer w0.03: U1.138@227.5,223.5 227.85,223.15 298.187,223.15 422.037,347 J3.138@439,347
NetJ3_138: J3.124 U1.154 | length 256
  Top Layer w0.03: U1.154@223.5,222.5 224.15,221.85 306.711,221.85 403.861,319 J3.124@439,319
NetJ3_139: J3.79 U1.259 | length 215.5
  Top Layer w0.03: U1.259@228.5,217.5 228.775,217.225 338.445,217.225 350.22,229 J3.79@439,229
NetJ3_140: J3.76 U1.256 | length 216.2
  Top Layer w0.03: U1.256@225.5,217.5 226,217 338.539,217 344.539,223 J3.76@439,223
NetJ3_141: J3.103 U1.193 | length 240.5
  Top Layer w0.03: U1.193@222.5,220.5 223.225,219.775 322.068,219.775 379.293,277 J3.103@439,277
NetJ3_142: J3.146 U1.116 | length 271.3
  Top Layer w0.03: U1.116@225.5,224.5 226,224 290.5,224 429.5,363 J3.146@439,363
NetJ3_143: J3.145 U1.115 | length 271.5
  Top Layer w0.03: U1.115@224.5,224.5 225.075,223.925 290.625,223.925 427.7,361 J3.145@439,361
NetJ3_144: J3.140 U1.140 | length 262.5
  Top Layer w0.03: U1.140@229.5,223.5 229.7,223.3 298.125,223.3 425.825,351 J3.140@439,351
NetJ3_145: J3.77 U1.257 | length 216
  Top Layer w0.03: U1.257@226.5,217.5 226.925,217.075 338.507,217.075 346.432,225 J3.77@439,225
NetJ3_146: J3.136 U1.136 | length 263.4
  Top Layer w0.03: U1.136@225.5,223.5 226,223 298.249,223 418.249,343 J3.136@439,343
NetJ3_147: J3.150 U1.120 | length 270.3
  Top Layer w0.03: U1.120@229.5,224.5 229.7,224.3 290,224.3 436.7,371 J3.150@439,371
NetJ3_148: J3.149 U1.119 | length 270.6
  Top Layer w0.03: U1.119@228.5,224.5 228.775,224.225 290.125,224.225 434.9,369 J3.149@439,369
NetJ3_149: J3.147 U1.117 | length 271
  Top Layer w0.03: U1.117@226.5,224.5 226.925,224.075 290.375,224.075 431.3,365 J3.147@439,365
NetJ3_150: J3.148 U1.118 | length 270.8
  Top Layer w0.03: U1.118@227.5,224.5 227.85,224.15 290.25,224.15 433.1,367 J3.148@439,367

## Silkscreen, mask and mechanical layers (free items; w line width, h text height)
Mechanical 1:
  the board outline again, w0.254